# Altium PCB PCB1.PcbDoc
Units mil, origin at the board's own origin, x right, y up, seen from the top; angles counter-clockwise.
Board outline 6000 x 4000 mil, 2 copper layers (Top Layer, Bottom Layer); 138 components, 85 nets, 381 pads, 0 vias.
Unrouted connection lines stored in the file: 270.
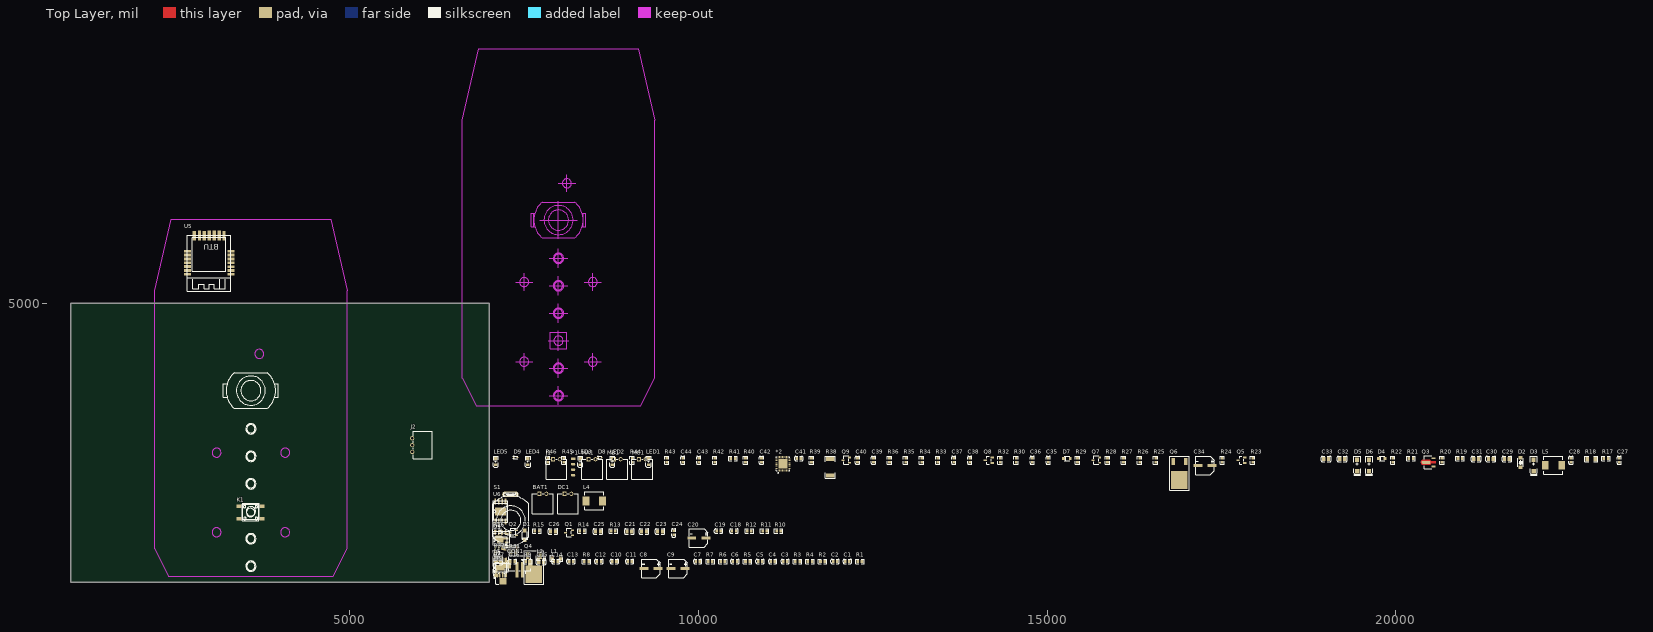
[diagram p0: Top Layer view]
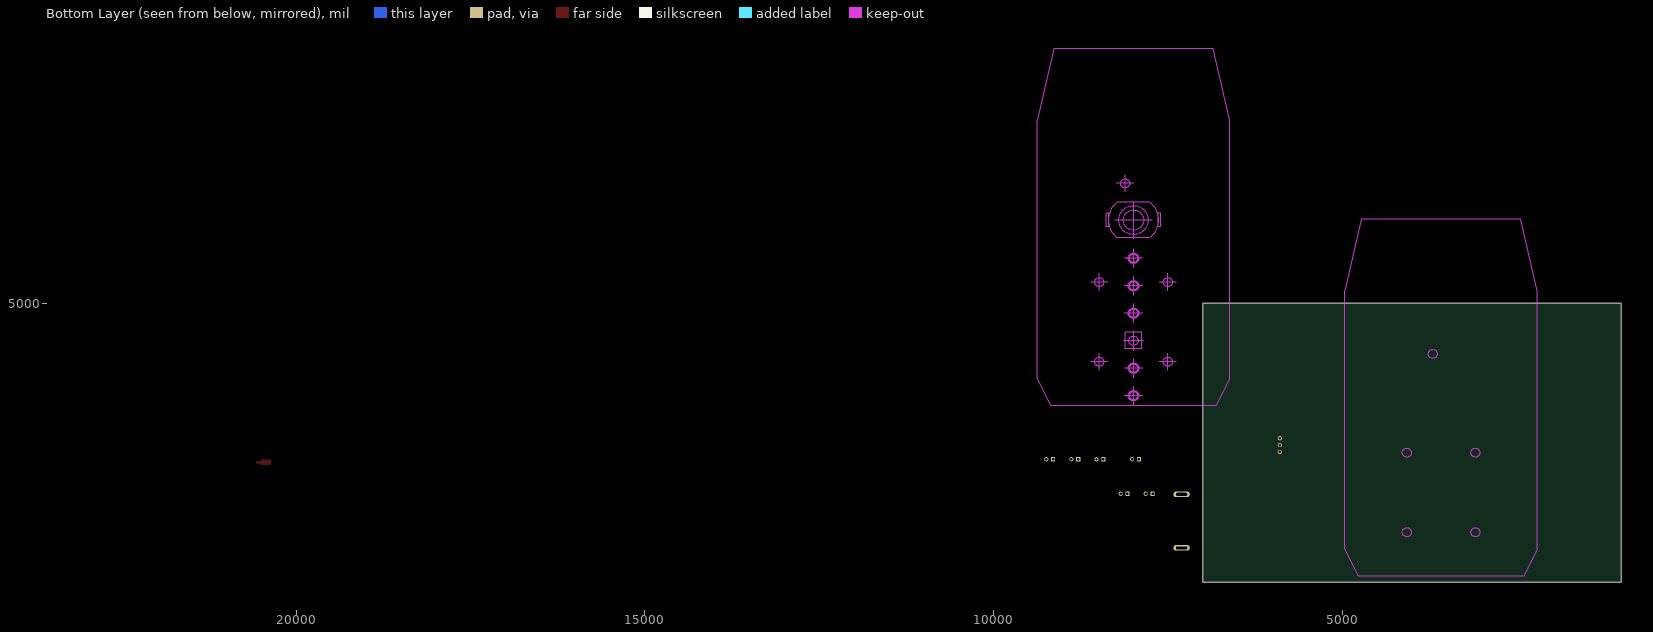
[diagram p1: Bottom Layer view, seen from below]

## Layer stack, top to bottom
Top Layer: signal copper 1.4
Dielectric: dielectric 12.6, FR-4, Dk 4.8
Bottom Layer: signal copper 1.4

## Board outline
1000,1000 7000,1000 7000,5000 1000,5000

## Design rules (kind name [scope] priority, off if disabled: settings)
Clearance [All] p1: gap=10
PolygonConnect [All] p1: connectstyle=Relief reliefconductorwidth=10 reliefentries=4 polygonreliefangle="90 Angle"
RoomDefinition 大号发球机 [InComponentClass('大号发球机')] p1: confinementstyle=ConfineIn formatcopy=TRUE lockcomponents=FALSE outline 7045,1450 7270,1450 7270,1860 7045,1860
RoomDefinition Power [InComponentClass('Power')] p2: confinementstyle=ConfineIn formatcopy=TRUE lockcomponents=FALSE outline 7045,1520 7305,1520 7305,1840 7045,1840
RoomDefinition AUDIO [InComponentClass('AUDIO')] p3: confinementstyle=ConfineIn formatcopy=TRUE lockcomponents=FALSE outline 7045,960 7255,960 7255,1400 7045,1400
RoutingVias [All] p1: holewidth=28 width=50 viastyle="Through Hole" minholewidth=28 minwidth=50 maxholewidth=28 maxwidth=50
SilkscreenOverComponentPads [All] p1: minsilkscreentomaskgap=10
SolderMaskExpansion [All] p1: expansion=4
TestPointUsage [All] p1: valid=0 allowmultiple=FALSE
Testpoint [All] p1: side=15 testpointundercomponent=TRUE minsize=40 maxsize=100 preferedsize=60 minholesize=0 maxholesize=40 preferedholesize=32 testpointgrid=1 style=1023 order=0-112345678
Width [All] p1: maxlimit=10 minlimit=10 preferedwidth=10
23 further rules are at their usual default settings.

## Classes and differential pairs
component class AUDIO: *1 C1 C2 C3 C4 C5 C6 C7 C8 C9 C10 C11 C12 C13 C14 C15 C16 C17 CN1 CON1 L1 L2 L3 MK R1 R2 R3 R4 R5 R6 R7 R8 R9 U1 U7
component class Power: BAT1 C18 C19 C20 C21 C22 C23 C24 C25 C26 D1 DC1 L4 Q1 Q2 R10 R11 R12 R13 R14 R15 R16 S1 U2 U3
component class 大号发球机: *2 C27 C28 C29 C30 C31 C32 C33 C34 C35 C36 C37 C38 C39 C40 C41 C42 C43 C44 D2 D3 D4 D5 D6 D7 D8 D9 J1 J2 K1 L5 LED1 LED2 LED3 LED4 LED5 MA1 MB1 MC1 P1 Q3 Q4 Q5 Q6 Q7 Q8 Q9 R17 R18 R19 R20 R21 R22 R23 R24 R25 R26 R27 R28 R29 R30 R31 R32 R33 R34 R35 R36 R37 R38 R39 R40 R41 R42 R43 R44 R45 R46 U4 U5 U6

## Components (designator, comment, footprint, x,y, rotation, side; value= is the part's Value field where it differs from the comment)
*2 "PY32F040K1BU6" QFN-32_L5.0-W5.0-P0.50-BL-EP3.4 11225,2695 r0 top
BAT1 "" CONN-TH_2P-P2.50_ZX-XH2.54-2PWZ 7770,2270 r0 top
C1 "22uf/10V" 0603_C 12135,1300 r0 top
C2 "100nf 16v" 0603_C 11960,1300 r0 top
C3 "10uf/10V" 0603_C 11245,1300 r0 top
C4 "1uf/10V" 0603_C 11065,1300 r0 top
C5 "10uf/10V" 0603_C 10885,1300 r0 top
C6 "100nf 16v" 0603_C 10525,1300 r0 top
C7 "51PF/16v" 0603_C 9990,1300 r0 top
C8 "220uf/10v" "SMD 6.3*7.7" 9320,1205 r0 top
C9 "220uf/10v" "SMD 6.3*7.7" 9710,1205 r0 top
C10 "10uf/10V" 0603_C 8795,1300 r0 top
C11 "10uf/10V" 0603_C 9015,1300 r0 top
C12 "100nf" 0603_C 8575,1300 r0 top
C13 "4.7uf/10V" 0603_C 8175,1300 r0 top
C14 "100nf" 0603_C 7955,1300 r0 top
C15 "1nF" C0805 7745,1295 r0 top
C16 "1uf/10V" 0603_C 7335,1300 r0 top
C17 "1nF" C0805 7125,1295 r0 top
C18 "100nf 16v" 0603_C 10510,1735 r0 top
C19 "100nf 16v" 0603_C 10290,1735 r0 top
C20 "220uf/10v" "SMD 6.3*7.7" 10005,1640 r0 top
C21 "22UF" 0805_C 9010,1730 r0 top
C22 "22UF" 0805_C 9220,1730 r0 top
C23 "22UF" 0805_C 9450,1730 r0 top
C24 "100nf 16v" 0603_C 9645,1710 r90 top
C25 "22UF" 0805_C 8560,1730 r0 top
C26 "22UF" 0805_C 7915,1730 r0 top
C27 "100nf 25v" 0603_C 23200,2750 r90 top
C28 "100nf 25v" 0603_C 22510,2750 r90 top
C29 "22UF" 0805_C 21590,2770 r0 top
C30 "0.1uf/25v" 0805_C 21360,2770 r0 top
C31 "22UF" 0805_C 21150,2770 r0 top
C32 "0.1uf/25v" 0805_C 19230,2770 r0 top
C33 "0.1uf/25v" 0805_C 19000,2770 r0 top
C34 "220uf/25v" "SMD 6.3*7.7" 17260,2680 r0 top
C35 "10uf" 0603_c 15015,2750 r90 top
C36 "1nF" 0603_C 14785,2750 r90 top
C37 "100nF" 0603_C 13660,2750 r90 top
C38 "0.1uf/25v" 0603_C 13890,2750 r90 top
C39 "100NF/50V" 0603_C 12510,2750 r90 top
C40 "100nF" 0603_C 12280,2750 r90 top
C41 "10uf" 0603_c 11440,2775 r0 top
C42 "0.1uf/25v" 0603_C 10905,2750 r90 top
C43 "0.1uf/25v" 0603_C 10005,2750 r90 top
C44 "100nF" 0603_C 9775,2750 r90 top
CON1 "SPK" CONN-SMD_2.0-2PLT 7445,1245 r0 top
D1 "SS54" SOD-123FL 7505,1680 r90 top
D2 "SMF5.0CA_C726939" "SOD-123 双向" 21790,2725 r90 top
D3 "SS24" SMA 21970,2700 r90 top
D4 "12V" SOD-323 19780,2825 r0 top
D5 "SS54" SMA 19440,2700 r90 top
D6 "SS54" SMA 19610,2700 r90 top
D7 "1N5819WS" SOD-323 15265,2825 r0 top
D8 "LESD5Z5.0CT1G" SOD-523_L1.2-W0.8-LS1.6-RD 8590,2790 r0 top
D9 "LESD5Z5.0CT1G" SOD-523_L1.2-W0.8-LS1.6-RD 7380,2790 r0 top
DC1 "" CONN-TH_2P-P2.50_ZX-XH2.54-2PWZ 8130,2270 r0 top
J1 "#NAME?" CONN-TH_2P-P2.50_ZX-XH2.54-2PWZ 7965,2765 r0 top
J2 "#NAME?" HDR-TH_3P-P2.50_ZX-XH2.54-3PWZ 6060,2940 r90 top
K1 "KEY" KEY_SMD_4P 3580,2000 r180 top
L1 "600R" 1206_R 7970,1345 r0 top
L2 "1K 0.5A" 0805_R 7735,1350 r0 top
L3 "1K 0.5A" 0805_R 7115,1350 r0 top
L4 "yspi0518s-100m 10uH" "L 6.6*7.0" 8510,2170 r0 top
L5 "0630-2R2" "L 6.6*7.0" 22260,2680 r0 top
LED1 "" 0805_LED 9290,2755 r90 top
LED2 "" 0805_LED 8770,2755 r90 top
LED3 "" 0805_LED 8310,2755 r90 top
LED4 "" 0805_LED 7560,2755 r90 top
LED5 "" 0805_LED 7100,2755 r90 top
MA1 "#NAME?" CONN-TH_2P-P2.50_ZX-XH2.54-2PWZ 8475,2765 r0 top
MB1 "#NAME?" CONN-TH_2P-P2.50_ZX-XH2.54-2PWZ 8835,2765 r0 top
MC1 "#NAME?" CONN-TH_2P-P2.50_ZX-XH2.54-2PWZ 9195,2765 r0 top
MK "" SMD_HC-1.25-2PLT 7165,1170 r90 top
P1 "" "4P 2.0" 8200,2660 r90 top
Q1 "2N7002" SOT-23 8165,1720 r0 top
Q2 "CJ3401" SOT-23 7365,1720 r0 top
Q3 "ap4438" SOT-89-3_L4.5-W2.5-P1.50-LS4.2-BR 20485,2720 r0 top
Q4 "ap70p03k" TO-252 7640,1250 r90 top
Q5 "S8050" SOT-23(SOT-23-3) 17785,2750 r0 top
Q6 "SM3113NSUC-VB" TO-252 16895,2600 r90 top
Q7 "S8550" SOT-23 15725,2760 r0 top
Q8 "S8050" SOT-23(SOT-23-3) 14160,2750 r0 top
Q9 "S8550" SOT-23 12140,2760 r0 top
R1 "10R" 0603_R 12315,1300 r0 top
R2 "2.2k" 0603_R 11780,1300 r0 top
R3 "56k" 0603_R 11420,1300 r0 top
R4 "56k" 0603_R 11600,1300 r0 top
R5 "100R" 0603_R 10705,1300 r0 top
R6 "13k" 0603_R 10350,1300 r0 top
R7 "2.7K" 0603_R 10170,1300 r0 top
R8 "27K" 0603_R 8395,1300 r0 top
R9 "27K" 0603_R 7555,1300 r0 top
R10 "32.4k" 0603_R 11150,1735 r0 top
R11 "30k" 0603_R 10950,1735 r0 top
R12 "100k" 0603_R 10730,1735 r0 top
R13 "10k" 0603_R 8780,1735 r0 top
R14 "20k" 0603_r 8330,1735 r0 top
R15 "10k" 0603_r 7685,1735 r0 top
R16 "10K" 0603_R 7115,1735 r0 top
R17 "10k" 0603_R 23010,2775 r0 top
R18 "0.05R" 1206_R 22805,2770 r0 top
R19 "10k" 0603_R 20920,2775 r0 top
R20 "10R" 0603_R 20660,2750 r90 top
R21 "10K" 0603_R 20215,2775 r0 top
R22 "10k" 0603_R 19955,2750 r90 top
R23 "1k" 0603_R 17945,2750 r90 top
R24 "10k" 0603_R 17510,2750 r90 top
R25 "10k" 0603_R 16555,2750 r90 top
R26 "470K" 0603_R 16325,2750 r90 top
R27 "1k" 0603_R 16095,2750 r90 top
R28 "0R" 0603_R 15865,2750 r90 top
R29 "10K" 0603_R 15435,2750 r90 top
R30 "1k" 0603_R 14555,2750 r90 top
R31 "51R" 0603_R 7345,1425 r0 top
R32 "10K" 0603_R 14325,2750 r90 top
R33 "100K" 0603_R 13430,2750 r90 top
R34 "1K" 0603_R 13200,2750 r90 top
R35 "10k" 0603_R 12970,2750 r90 top
R36 "10K" 0603_R 12740,2750 r90 top
R37 "1K" 0603_R 7090,1400 r90 top
R38 "003R" 2512_R 11925,2645 r0 top
R39 "0R" 0603_R 11620,2750 r90 top
R40 "100k" 0603_R 10675,2750 r90 top
R41 "10K" 0603_R 10495,2775 r0 top
R42 "10k" 0603_R 10235,2750 r90 top
R43 "1k" 0603_r 9545,2750 r90 top
R44 "3.3K" 0603_R 9050,2750 r90 top
R45 "10K" 0603_R 8070,2750 r90 top
R46 "1K" 0603_R 7840,2750 r90 top
S1 "*" 大按键 7370,2025 r90 top
U1 "lmv358b-sr" SOP8 7170,1215 r0 top
U2 "tmi3493" SOP8 7170,1215 r0 top
U3 "me6210a30pg" SOT-89 7005,1645 r0 top
U4 "ASC6211" SOP8-9 7160,1605 r0 top
U5 "BTU" BTU 3300,6120 r180 top
U6 "W25NO1GVZE1G" SOP8-150+208 7160,2015 r90 top
U7 "CST8336" ESOP-10 7245,1225 r0 top

## Footprints (in the part's own frame and the unit in brackets; to place one, negate y for a bottom-side part, rotate by r counter-clockwise, add the part's x,y. Pads: shape width x height; smd on the part's side, far side on the other; paste and mask are expansions set on the pad)
"4P 2.0" [mm]
  rect 1x1.6 smd: 1(2.87,-0.076)
  oval 1x1.6 smd: 2(0.87,-0.076) 3(-1.13,-0.076) 4(-3.13,-0.076)
0603_C [mm]
  rect 0.93x0.98 smd: 1(-0.77,0) 2(0.77,0)
  silkscreen extent -1.54,-0.79 1.54,0.79, body extent -0.8,-0.4 0.8,0.4, height 0.3
0603_c [mm]
  rect 0.93x0.98 smd: 1(-0.77,0) 2(0.77,0)
  silkscreen extent -1.54,-0.79 1.54,0.79, body extent -0.8,-0.4 0.8,0.4, height 0.3
0603_R [mm]
  rect 0.93x0.98 smd: 1(-0.77,0) 2(0.77,0)
  silkscreen extent -1.53,-0.79 1.54,0.79, body extent -0.85,-0.4 0.85,0.4, height 0.56
0603_r [mm]
  rect 0.93x0.98 smd: 1(-0.77,0) 2(0.77,0)
  silkscreen extent -1.53,-0.79 1.54,0.79, body extent -0.85,-0.4 0.85,0.4, height 0.56
0805_C [mm]
  rect 1.16x1.47 smd: 1(-0.89,0) 2(0.89,0)
  silkscreen extent -1.77,-1.04 1.77,1.04, body extent -1,-0.62 1,0.63, height 0.77
0805_LED [mm]
  rect 1x1.25 smd: 1(0.482,0.112) 2(-1.718,0.112)
  silkscreen extent -2.72,-0.84 1.36,1.07
0805_R [mm]
  rect 0.9x1.27 smd: 1(1.318,-0.024) 2(-0.782,-0.024)
  silkscreen extent -1.47,-0.88 2,0.83
1206_R [mil]
  rect 47.54x66.97 smd: 1(-64.23,-1.52) 2(52.21,-1.52)
  silkscreen extent -97,-44 85,41
2512_R [mil]
  rect 125.98x60 smd: 1(-35.33,124.72) 2(-35.33,-111.5)
  silkscreen extent -106,-151 36,164
BTU [mm]
  rect 2.6x1 smd paste+0 mask+0.102: 1(0.051,17.882) 2(0.051,16.482) 3(0.051,15.082) 4(0.049,13.68) 5(0.051,12.282) 6(0.051,10.882) 7(0.051,9.482) 15(15.9,9.48) 16(15.9,10.88) 17(15.9,12.28) 18(15.9,13.68) 19(15.9,15.08) 20(15.9,16.48) 21(15.9,17.88)
  rect 1.2x3.6 smd paste+0 mask+0.102: 8(2.602,3.834) 9(4.3,3.8) 10(6.1,3.8) 11(7.9,3.8) 12(9.802,3.834) 13(11.5,3.8) 14(13.402,3.834)
  silkscreen extent 0.1,3.68 15.9,24
C0805 [mm]
  rect 1.16x1.47 smd: 1(-0.89,0) 2(0.89,0)
  silkscreen extent -1.77,-1.04 1.77,1.04, body extent -1,-0.62 1,0.63, height 0.77
CONN-SMD_2.0-2PLT [mm]
  rect 1x5.5 smd: 1(0.798,-1.644) 2(-1.202,-1.644)
  rect 1.6x3 smd: 3(3.698,0.406) 4(-4.102,0.406)
  silkscreen extent -4.2,-2.87 3.8,3.48
CONN-TH_2P-P2.50_ZX-XH2.54-2PWZ [mm]
  rect 1.524x1.5 hole 0.9: 1(-1.25,0)
  round 1.5 hole 0.9: 2(1.25,0)
  silkscreen extent -3.8,-7.32 3.81,0
ESOP-10 [mm]
  rect 0.6x1.5 smd paste+0 mask+0.05: 1(-4.316,-3.238) 2(-3.316,-3.238) 3(-2.316,-3.238) 4(-1.316,-3.238) 5(-0.316,-3.238) 6(-0.316,2.362) 7(-1.316,2.362) 8(-2.316,2.362) 9(-3.316,2.362) 10(-4.316,2.362)
  rect 3.3x2 smd paste+0 mask+0.05: 11(-2.316,-0.438)
  silkscreen extent -4.82,-2.39 0.18,1.51
HDR-TH_3P-P2.50_ZX-XH2.54-3PWZ [mm]
  round 1.5 hole 0.9: 1(-1.801,4.145) 2(0.699,4.145) 3(3.199,4.145)
  silkscreen extent -4.3,-3.18 5.7,3.83
KEY_SMD_4P [mm]
  rect 1.9x1.3 smd: 1(-4.155,2.252) 2(4.244,2.252) 3(-4.155,-2.247) 4(4.244,-2.247)
  silkscreen extent -3.01,-3.05 3.02,3.05
"L 6.6*7.0" [mm]
  rect 2.4x3.2 smd: 1(-3.093,-0.069) 2(2.907,-0.069)
  silkscreen extent -3.59,-3.37 3.41,3.23
QFN-32_L5.0-W5.0-P0.50-BL-EP3.4 [mm]
  oval 0.28x0.8 smd paste+0 mask+0.05: 1(-2.049,-2.273) 2(-1.549,-2.273) 3(-1.049,-2.273) 4(-0.549,-2.273) 5(-0.049,-2.273) 6(0.451,-2.273) 7(0.951,-2.273) 8(1.451,-2.273) 17(1.451,2.527) 18(0.951,2.527) 19(0.451,2.527) 20(-0.049,2.527) 21(-0.549,2.527) 22(-1.049,2.527) 23(-1.549,2.527) 24(-2.049,2.527)
  oval 0.8x0.28 smd paste+0 mask+0.05: 9(2.101,-1.623) 10(2.101,-1.123) 11(2.101,-0.623) 12(2.101,-0.123) 13(2.101,0.377) 14(2.101,0.877) 15(2.101,1.377) 16(2.101,1.877) 25(-2.699,1.877) 26(-2.699,1.377) 27(-2.699,0.877) 28(-2.699,0.377) 29(-2.699,-0.123) 30(-2.699,-0.623) 31(-2.699,-1.123) 32(-2.699,-1.623)
  rect 3.4x3.4 smd paste+0 mask+0.05: 33(-0.299,0.127)
  silkscreen extent -2.8,-3.3 2.2,2.63
SMA [mm]
  rect 1.65x1.53 smd: 1(1.449,-0.076) 2(-2.665,-0.102)
  silkscreen extent -4.16,-1.47 2.8,1.32, body extent -3.06,-1.39 1.84,1.18, height 2.39
"SMD 6.3*7.7" [mm]
  rect 3.26x1.15 smd: 1(2.549,-0.129) 2(-2.561,-0.129)
  silkscreen extent -3.4,-3.51 3.36,3.25
SMD_HC-1.25-2PLT [mm]
  rect 0.8x1.62 smd: 1(-1.63,1.953) 2(-0.38,1.953)
  rect 2.35x2.5 smd: 3(1.895,-0.807) 4(-3.905,-0.807)
  silkscreen extent -4.94,-1.7 2.93,2.53
"SOD-123 双向" [mm]
  rect 1.2x1.4 smd: 1(-1.864,0.06) 2(1.536,0.06)
  silkscreen extent -1.66,-0.94 1.34,1.06
SOD-123FL [mm]
  rect 1.4x1.2 smd: 1(1.579,-0.166) 2(-1.891,-0.166)
  silkscreen extent -1.76,-1.17 1.22,0.84
SOD-323 [mm]
  rect 1x1 smd: 1(1.625,-1.235) 2(-0.774,-1.235)
  silkscreen extent -0.57,-2.03 1.43,-0.44
SOD-523_L1.2-W0.8-LS1.6-RD [mm]
  rect 0.6x0.36 smd paste+0.051 mask+0: 1(-0.65,0) 2(0.65,0)
  silkscreen extent -0.91,-0.55 0.68,0.55
SOP8 [mm]
  oval 0.63x1.865 smd: 1(-1.905,-2.682) 2(-0.635,-2.682) 3(0.635,-2.682) 4(1.905,-2.682) 5(1.905,2.682) 6(0.635,2.682) 7(-0.635,2.682) 8(-1.905,2.682)
  silkscreen extent -2.82,-2.83 2.58,1.52
SOP8-9 [mil]
  oval 24x66.93 smd: 1(-75,-110) 2(-25,-110) 3(25,-110) 4(75,-110) 5(75,110) 6(25,110) 7(-25,110) 8(-75,110)
  rect 90.55x90.55 smd: 9(0,0)
  silkscreen extent -100,-50 100,50, body extent -100,-119 98,119, height 63
SOP8-150+208 [mm]
  rect 2.2x0.6 smd: 1(-3.65,1.905) 2(-3.65,0.635) 3(-3.65,-0.635) 4(-3.65,-1.905) 5(3.65,-1.905) 6(3.65,-0.635) 7(3.65,0.635) 8(3.65,1.905)
  rect 3x4 smd: 9(0,0)
  silkscreen extent -5.32,-2.64 3.95,2.64
SOT-23 [mm]
  rect 1.07x0.6 smd: 1(0.719,-1.166) 2(0.719,0.734) 3(-1.751,-0.216)
  silkscreen extent -1.39,-1.75 0.36,1.32
SOT-23(SOT-23-3) [mm]
  rect 1.25x0.7 smd: 1(1.25,-0.95) 2(1.25,0.95) 3(-1.25,0)
  silkscreen extent -0.65,-1.46 0.9,1.46, body extent -1.5,-1.5 1.5,1.5, height 1.3
SOT-89 [mm]
  rect 1.35x0.7 smd: 1(6.223,-1.854) 3(6.223,1.146)
  oct 3.15x1.9 smd: 2(3.358,-0.354)
  rect 2.2x0.7 smd: 2(5.817,-0.356)
  silkscreen extent 1.29,-2.85 7.29,2.15, body extent 2.28,-2.62 6.48,1.98, height 1.55
SOT-89-3_L4.5-W2.5-P1.50-LS4.2-BR [mm]
  rect 1.575x0.672 smd: 1(1.356,-1.5) 3(1.356,1.5)
  oval 3.226x1.14 smd: 2(-1.356,0)
  Top Layer region: -2.283,0.95 -0.429,0.95 -0.384,0.949 -0.34,0.946 -0.296,0.94 -0.252,0.933 -0.208,0.924 -0.165,0.912 -0.123,0.899 -0.081,0.884 -0.04,0.866 0,0.847 0.04,0.826 0.078,0.803 0.115,0.779 0.151,0.752 0.185,0.724 0.219,0.695 0.251,0.664 0.281,0.631 0.31,0.597 0.337,0.562 0.362,0.525 0.386,0.488 0.408,0.449 0.428,0.409 0.447,0.33 2.144,0.33 2.144,-0.33 0.447,-0.33 0.428,-0.409 0.408,-0.449 0.386,-0.488 0.362,-0.526 0.337,-0.562 0.31,-0.597 0.281,-0.631 0.251,-0.664 0.219,-0.695 0.185,-0.725 0.151,-0.753 0.115,-0.779 0.078,-0.804 0.04,-0.827 0,-0.848 -0.04,-0.867 -0.081,-0.884 -0.123,-0.899 -0.165,-0.913 -0.208,-0.924 -0.252,-0.934 -0.296,-0.941 -0.34,-0.946 -0.384,-0.949 -0.429,-0.95 -2.283,-0.95 -2.328,-0.949 -2.372,-0.946 -2.416,-0.941 -2.46,-0.934 -2.504,-0.924 -2.547,-0.913 -2.589,-0.899 -2.631,-0.884 -2.672,-0.867 -2.713,-0.848 -2.752,-0.827 -2.79,-0.804 -2.827,-0.779 -2.863,-0.753 -2.898,-0.725 -2.931,-0.695 -2.963,-0.664 -2.993,-0.631 -3.022,-0.597 -3.049,-0.562 -3.075,-0.526 -3.098,-0.488 -3.12,-0.449 -3.141,-0.409 -3.159,-0.369 -3.175,-0.327 -3.189,-0.285 -3.202,-0.242 -3.212,-0.199 -3.22,-0.155 -3.227,-0.111 -3.231,-0.067 -3.233,-0.022 -3.233,0.022 -3.231,0.067 -3.227,0.111 -3.22,0.155 -3.212,0.199 -3.202,0.242 -3.189,0.285 -3.175,0.327 -3.159,0.369 -3.141,0.409 -3.12,0.449 -3.098,0.488 -3.075,0.525 -3.049,0.562 -3.022,0.597 -2.993,0.631 -2.963,0.664 -2.931,0.695 -2.898,0.724 -2.863,0.752 -2.827,0.779 -2.79,0.803 -2.752,0.826 -2.713,0.847 -2.672,0.866 -2.631,0.884 -2.589,0.899 -2.547,0.912 -2.504,0.924 -2.46,0.933 -2.416,0.94 -2.372,0.946 -2.328,0.949
  silkscreen extent -1.95,-2.33 0.7,2.33
TO-252 [mm]
  rect 2.5x1.3 smd: 1(3.429,-2.286) 3(3.429,2.286)
  rect 6.5x6 smd: 2(-3.429,0)
  silkscreen extent -7.11,-3.56 5.21,3.56, body extent -5.92,-3.3 3.33,3.3, height 2.31
大按键 [mm]
  oval 2x6 hole 1 slot 4 at 90 deg: 1(-13.49,1.651) 2(6.01,1.651)
  silkscreen extent -13.49,-4.99 6.51,8.01

## Part data
BAT1 DC1 J1 MA1 MB1 MC1: library part BX-PH2.0-2PZZ
C1 C2 C3 C4 C5 C6 C7 C10 C11 C12 C13 C14 C16 C18 C19 C24 C27 C28 C30 C32 C33 C38 C42 C43: library part Cap, "Capacitor"
C8 C9 C20 C34: library part RVT1A221M0605_C72494
C15 C17: library part CAP_0805
C21 C22 C23 C25 C26 C29 C31 C36 C37 C40 C44: library part CAP
C35 C41: library part C-0603, "C-?-K-0603"
C39: library part Cap1, "无极电容"
CON1 MK: library part HC-1.25-2PLT
D1: library part "Diode 1N4148", "High Conductance Fast Diode"
D3 D5 D6: library part D-SS24-SMA, "DO214AC"
D4 D7: library part DIODE
J2: library part BX-PH2.0-3PZZ
K1: library part TS-1002S-05026C
L1: library part CBW321609U601T
L2 L3: library part SBK201209T-102Y-N
L4: library part yspi0518s-100m
L5: library part FXL0630-4R7-M
LED1 LED2 LED3 LED4 LED5: library part LED0, "Typical INFRARED GaAs LED"
P1: library part "Header 4", "Header, 4-Pin"
Q1: library part JMTL3400A
Q5 Q8: library part NPN_sot23, "NPN三极管"
Q6: library part NMOS1, "N沟道MOS管"
Q7 Q9: library part S8550_C545533
R1 R2 R3 R4 R5 R6 R7 R8 R9 R10 R11 R12 R13 R17 R18 R19 R21 R26 R28 R29 R31 R32 R33 R36 R37 R39 R41 R43 R44 R45 R46: library part RES
R14 R15: library part Res1, "贴片电阻"
R16 R20 R22 R23 R24 R25 R27 R30 R34 R35 R38 R40 R42: library part Res2, "Resistor"
S1: library part TS-3625SP-2P
U6: library part 24C08_3

## Nets (pads, with @x,y where several pads share a name; then routed paths per layer and width w, separated by ;. In a path a pad name is that pad's centre, name@x,y a point inside that pad or via, vN(x,y) a via of type N, cw(c..) or ccw(c..) an arc to the next point about the centre after c; other vN are vias at no path point)
3V3: *2.5 *2.17 C6.2 C25.1 C35.2 C38.1 C41.2 C42.1 J1.2 P1.1 R1.2 R3.2 R13.1 R32.1 R39.1 R40.1 R43.1 R45.2 R46.1 U1.8 U3.3 U5.14
3V3_FLASH: C43.1 R39.2 R41.2 U6.8
+5V: C18.1 C19.1 C20.1 C26.2 L1.2 L4.2 R12.2 U3.2
AD_BAT: *2.6 C37.2 R29.2
AD_I_SHUNT: *2.7 C39.1 R34.1
BAT+: Q2.3 R26.1 S1.1
BAT_IN+: BAT1.1 C30.2 C31.2 C32.2 C33.2 C34.1 D3.2 D4.2 D5.2 D6.2 MA1.2 MB1.1 MC1.2 Q4.3 Q7.2 R18.2 R22.2 R25.2 S1.2 U4.5
CHARG_STY: *2.26 U4.3
CHRG_STATE: *2.27 U4.2
FLASH-CS: R41.1 U5.10 U6.1
FLASH-HOLD: U5.3 U6.7
FLASH-SCK: U5.2 U6.6
FLASH-SDI: U5.5 U6.5
FLASH-SDO: U5.16 U6.2
FLASH-WP: U5.11 U6.3
GND: *2.4 *2.16 *2.33 BAT1.2 C1.2 C2.2 C5.2 C6.1 C8.2 C9.2 C10.2 C11.2 C12.2 C15.1 C16.2 C17.1 C19.2 C20.2 C21.1 C22.1 C23.1 C24.2 C25.2 C26.1 C27.2 C29.1 C31.1 C34.2 C35.1 C36.2 C37.1 C38.2 C39.2 C40.1 C41.1 C42.2 C43.2 C44.1 D2.1 D8.1 D9.1 DC1.2 K1.1 K1.2 MK.2 P1.2 Q1.2 Q3.3 Q5.2 Q8.2 Q9.3 R4.2 R6.2 R10.1 R11.2 R15.1 R16.1 R19.1 R21.1 R24.1 R33.2 R35.1 R36.1 R37.1 R38.1 R42.2 U1.4 U2.7 U2.8 U3.1 U4.9 U5.13 U6.4 U6.9
IE_PWM: *2.8 R44.1
IR: D9.2 J2.1 R45.1
IR_CON: *2.10 J2.2
KEY: *2.12 K1.3 K1.4
LED_G: *2.14 LED5.2
LED_H: *2.1 LED1.2
LED_L: *2.24 LED3.2
LED_M: *2.2 LED2.2
LED_R: *2.15 LED4.2
LINEOUT_L: C14.2 C36.1 R28.1 R36.2
LOSE_MOTOR_PWM: *2.20 R20.1
MIC_OUT: U1.6 U1.7 U5.17
MOTOR_BRAKE: *2.19 R23.2
MOTOR_PWM: *2.18 R30.1
Net*2_3: *2.3 C44.2 R40.2
Net*2_30: *2.30 R42.1
NetC1_1: C1.1 C2.1 R1.1 R2.2
NetC3_1: C3.1 MK.1 R2.1
NetC3_2: C3.2 R3.1 R4.1 U1.3
NetC4_1: C4.1 R6.1 U1.5
NetC4_2: C4.2 C7.2 R7.1 U1.1
NetC5_1: C5.1 R5.2
NetC7_1: C7.1 R5.1 R7.2 U1.2
NetC8_1: C8.1 C10.1 C16.1 L1.1 U7.1 U7.5
NetC9_1: C9.1 C11.1 U7.10
NetC13_1: C13.1 U7.3
NetC13_2: C13.2 U7.2
NetC14_1: C14.1 R9.1
NetC15_2: C15.2 CON1.2 L2.2
NetC17_2: C17.2 CON1.1 L3.2
NetC18_2: C18.2 R10.2 R12.1 U2.1
NetC27_1: C27.1 R17.1
NetC28_1: C28.1 U4.7
NetC28_2: C28.2 L5.1 R17.2 U4.8
NetC30_1: C30.1 D3.1 MC1.1 Q3.2
NetC32_1: C32.1 C33.1 D5.1 D6.1 MA1.1 MB1.2 Q4.2 Q6.2
NetD4_1: D4.1 Q4.1 Q5.3 R22.1
NetD7_1: D7.1 Q7.3 Q9.1 R37.2
NetD7_2: D7.2 R31.2
NetD8_2: D8.2 J1.1 R44.2
NetL4_1: L4.1 U2.5 U2.6
NetL5_2: L5.2 R18.1 U4.6
NetLED1_1: LED1.1 LED2.1 LED3.1 R43.2
NetLED4_1: LED4.1 LED5.1 R46.2
NetQ1_1: Q1.1 R14.1 R15.2
NetQ3_1: Q3.1 R20.2 R21.2
NetQ5_1: Q5.1 R23.1 R24.2
NetQ6_1: Q6.1 Q9.2 R31.1
NetQ6_3: Q6.3 R34.2 R38.2
NetQ7_1: Q7.1 R25.1 R27.2
NetQ8_1: Q8.1 R30.2 R35.2
NetQ8_3: Q8.3 R27.1
NetR8_2: R8.2 U7.7
NetR11_1: R11.1 U2.2
NetR19_2: R19.2 U4.4
NetR26_2: R26.2 R29.1 R33.1
NetR28_2: R28.2 U5.8
OUTN: L3.1 U7.9
OUTP: L2.1
RESET: C40.2 R32.2 U5.18
RX: *2.31 U5.6
SPK_CTRL: U5.9 U7.4
SWC: *2.25 P1.3
SWD: *2.23 P1.4
SWS: U5.4
TX: *2.32 U5.15
USB_DEC: *2.28 Q1.3 R13.2
VCC_1: C21.2 C22.2 C23.2 C24.1 D1.2 J2.3 Q2.2 U2.4
VCC_USB: C29.2 D1.1 D2.2 DC1.1 Q2.1 R14.2 R16.2 U4.1
pads on no net: *2.9 *2.11 *2.13 *2.21 *2.22 *2.29 C12.1 CON1.3 CON1.4 MK.3 MK.4 R8.1 R9.2 U2.3 U5.1 U5.7 U5.12 U5.19 U5.20 U5.21 U7.6 U7.8 U7.11

## Keep-outs
Keep-Out Layer:
  circle w1: c3704.8,4275.62 r64.96
  circle w1: c3091.69,1717.93 r64.96
  circle w1: c3091.69,2859.67 r64.96
  circle w1: c4075.94,1717.93 r64.96
  circle w1: c4075.94,2859.67 r64.96
  circle w1: c7993.82,5251.52 r59.06
  circle w1: c7993.82,5645.22 r59.06
  circle w1: c8114.8,6720.62 r64.96
  circle w1: c8485.94,5304.67 r64.96
  circle w1: c7993.82,5251.52 r74.8
  circle w1: c7993.82,5645.22 r74.8
  circle w1: c7993.82,6193.64 r144.69
  circle w1: c7993.82,6193.64 r208.66
  circle w1: c7993.82,3676.71 r59.06
  circle w1: c7993.82,4070.41 r59.06
  circle w1: c7993.82,4857.82 r59.06
  circle w1: c8485.94,4162.93 r64.96
  circle w1: c7993.82,4464.11 r66.93
  circle w1: c7993.82,3676.71 r74.8
  circle w1: c7993.82,4070.41 r74.8
  circle w1: c7993.82,4857.82 r74.8
  circle w1: c7501.69,5304.67 r64.96
  circle w1: c7501.69,4162.93 r64.96
  lines w1: 7377.68,4162.93 7501.69,4162.93 ; 7377.68,5304.67 7501.69,5304.67 ; 7501.69,4038.92 7501.69,4162.93 ; 7501.69,4286.95 7501.69,4162.93 ; 7501.69,5180.65 7501.69,5304.67 ; 7501.69,5428.68 7501.69,5304.67 ; 7625.71,4162.93 7501.69,4162.93 ; 7625.71,5304.67 7501.69,5304.67 ; 7639.49,6095.22 7639.49,6292.07 ; 7654.22,6095.22 7600.12,6095.22 7600.12,6292.07 7654.22,6292.07 ; 7726.1,6193.64 7993.82,6193.64 ; 7850.2,4464.11 7993.82,4464.11 ; 7859.96,3676.71 7993.82,3676.71 ; 7859.96,4070.41 7993.82,4070.41 ; 7859.96,4857.82 7993.82,4857.82 ; 7859.96,5251.52 7993.82,5251.52 ; 7859.96,5645.22 7993.82,5645.22 ; 7990.79,6720.62 8114.8,6720.62 ; 7993.82,3542.85 7993.82,3676.71 ; 7993.82,3810.57 7993.82,3676.71 ; 7993.82,3936.55 7993.82,4070.41 ; 7993.82,4204.27 7993.82,4070.41 ; 7993.82,4320.49 7993.82,4464.11 ; 7993.82,4607.73 7993.82,4464.11 ; 7993.82,4723.96 7993.82,4857.82 ; 7993.82,4991.67 7993.82,4857.82 ; 7993.82,5117.66 7993.82,5251.52 ; 7993.82,5385.37 7993.82,5251.52 ; 7993.82,5511.36 7993.82,5645.22 ; 7993.82,5779.08 7993.82,5645.22 ; 7993.82,5925.93 7993.82,6193.64 ; 7993.82,6461.36 7993.82,6193.64 ; 8114.8,6596.6 8114.8,6720.62 ; 8114.8,6844.64 8114.8,6720.62 ; 8127.68,3676.71 7993.82,3676.71 ; 8127.68,4070.41 7993.82,4070.41 ; 8127.68,4857.82 7993.82,4857.82 ; 8127.68,5251.52 7993.82,5251.52 ; 8127.68,5645.22 7993.82,5645.22 ; 8137.44,4464.11 7993.82,4464.11 ; 8238.82,6720.62 8114.8,6720.62 ; 8261.53,6193.64 7993.82,6193.64 ; 8333.42,6095.22 8387.52,6095.22 8387.52,6292.07 8333.42,6292.07 ; 8348.15,6095.22 8348.15,6292.07 ; 8361.93,4162.93 8485.94,4162.93 ; 8361.93,5304.67 8485.94,5304.67 ; 8485.94,4038.92 8485.94,4162.93 ; 8485.94,4286.95 8485.94,4162.93 ; 8485.94,5180.65 8485.94,5304.67 ; 8485.94,5428.68 8485.94,5304.67 ; 8609.96,4162.93 8485.94,4162.93 ; 8609.96,5304.67 8485.94,5304.67 ; 2205.86,1481.71 2402.71,1088.01 4764.92,1088.01 4961.77,1481.71 4961.77,5182.5 4725.55,6206.12 2442.08,6206.12 2205.86,5182.5 2205.86,1481.71 ; 6615.86,3926.71 6615.86,7627.5 6852.08,8651.12 9135.55,8651.12 9371.77,7627.5 9371.77,3926.71 9174.92,3533.01 6812.71,3533.01 6615.86,3926.71 ; 7757.6,5937.77 cw(c7975.71,6193.64) 7757.6,6449.52 8230.04,6449.52 cw(c8011.93,6193.64) 8230.04,5937.77 7757.6,5937.77 ; 7875.71,4346 7875.71,4582.22 8111.93,4582.22 8111.93,4346 7875.71,4346

## Silkscreen, mask and mechanical layers (free items; w line width, h text height)
Top Overlay:
  circle w1: c3583.82,1231.71 r74.8
  circle w1: c3583.82,1231.71 r59.06
  circle w1: c3583.82,1625.41 r74.8
  circle w1: c3583.82,1625.41 r59.06
  circle w1: c3583.82,2019.11 r66.93
  circle w1: c3583.82,2412.82 r59.06
  circle w1: c3583.82,2412.82 r74.8
  circle w1: c3583.82,2806.52 r74.8
  circle w1: c3583.82,2806.52 r59.06
  circle w1: c3583.82,3200.22 r74.8
  circle w1: c3583.82,3200.22 r59.06
  circle w1: c3583.82,3748.64 r208.66
  circle w1: c3583.82,3748.64 r144.69
  lines w1: 3244.22,3650.22 3190.12,3650.22 3190.12,3847.07 3244.22,3847.07 ; 3923.42,3650.22 3977.52,3650.22 3977.52,3847.07 3923.42,3847.07 ; 3347.59,3492.77 cw(c3565.71,3748.64) 3347.59,4004.52 3820.04,4004.52 cw(c3601.93,3748.64) 3820.04,3492.77 3347.6,3492.77 ; 3465.71,1901 3465.71,2137.22 3701.93,2137.22 3701.93,1901 3465.71,1901